# Altium PCB MB1066.PcbDoc
Units mm, origin at the board's own origin, x right, y up, seen from the top; angles counter-clockwise.
Board outline 16 x 38 mm, 2 copper layers (Top Layer, Bottom Layer), stack 1.571 mm thick; 21 components, 24 nets, 108 pads, 46 vias.
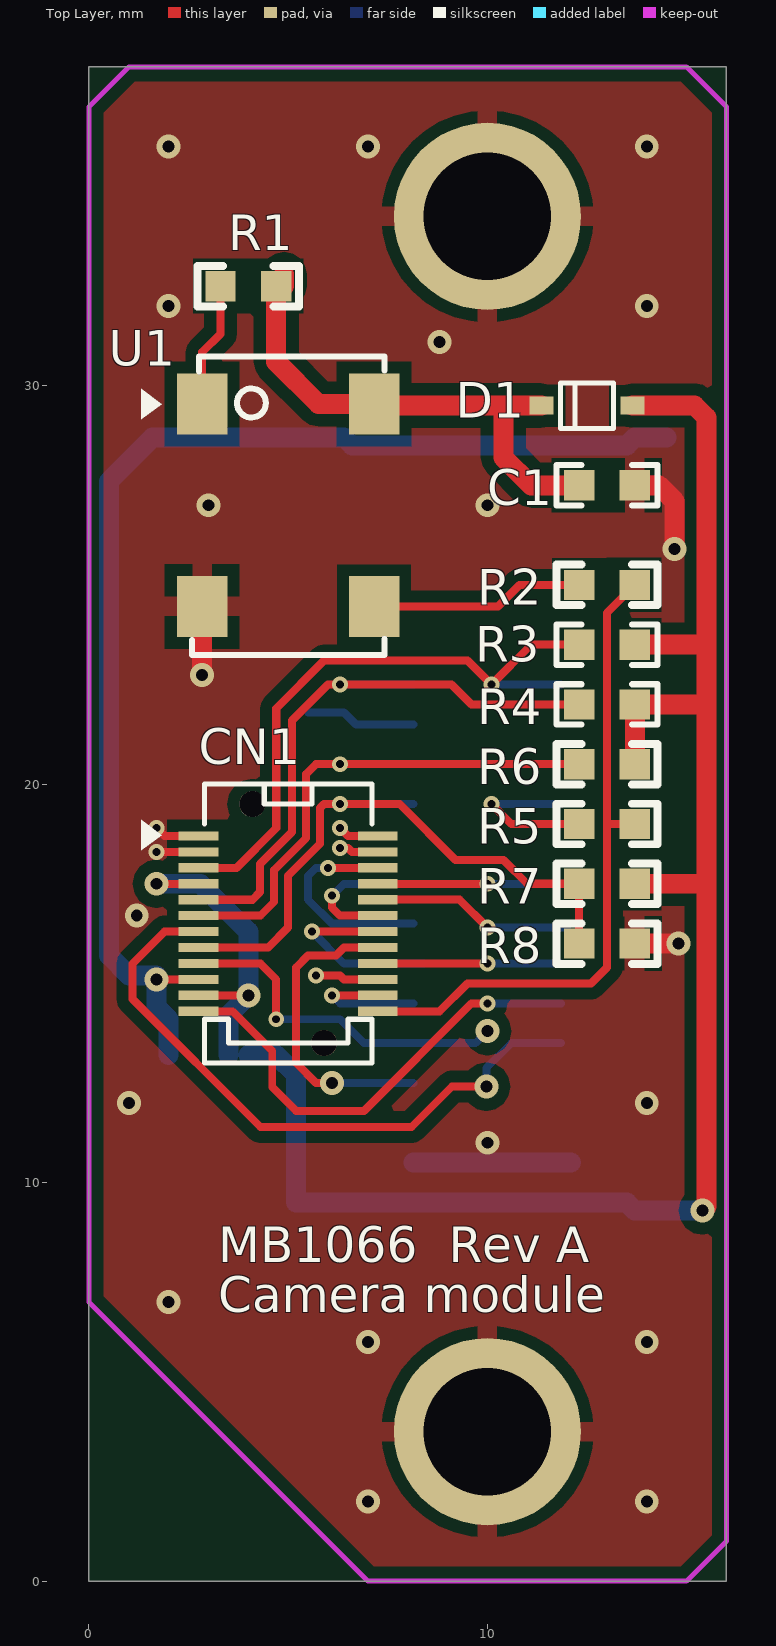
[diagram p0: Top Layer view]
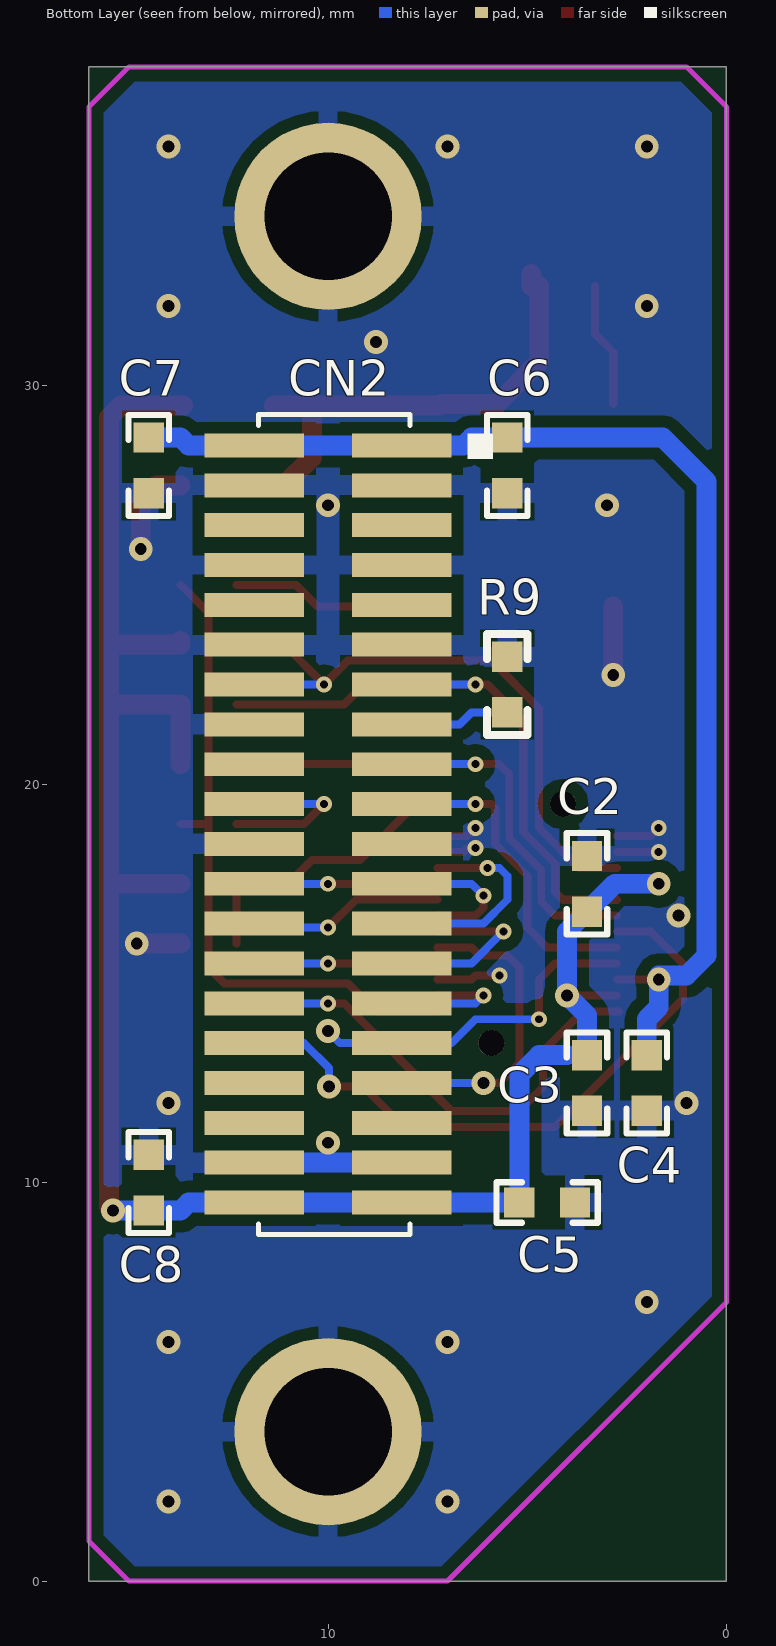
[diagram p1: Bottom Layer view, seen from below]

## Layer stack, top to bottom
Top Layer: signal copper 0.0356
Dielectric: core 1.5, FR-4, Dk 4.8
Bottom Layer: signal copper 0.0356

## Board outline
0,0 0,38 16,38 16,0 0,0

## Design rules (kind name [scope] priority, off if disabled: settings)
Clearance Clearance_1 [(InPoly)] p1: gap=0.3
Clearance [All] p2: gap=0.15
ComponentClearance [All] p1: gap=0.254 collisioncheckmode=3 verticalgap=0.254
HoleSize [All] p1: absolutevalues=TRUE maxlimit=3.81 minlimit=0.025 maxpercent=80.000 minpercent=20.000
PlaneClearance [All] p1: clearance=0.5
PolygonConnect PolygonConnect_2 [(InComponent('CN1'))] p1: connectstyle=NoConnect reliefconductorwidth=0.254 reliefentries=2 polygonreliefangle="90 Angle"
PolygonConnect PolygonConnect_1 [IsVia] p2: connectstyle=Direct reliefconductorwidth=0.508 reliefentries=4 polygonreliefangle="90 Angle"
PolygonConnect [All] p3: connectstyle=Relief reliefconductorwidth=0.5 reliefentries=4 polygonreliefangle="90 Angle"
RoutingLayers [All] p1: top layer_v5=FALSE bottom layer_v5=FALSE
RoutingVias [All] p1: holewidth=0.3 width=0.6 viastyle="Through Hole" minholewidth=0.2 minwidth=0.4 maxholewidth=0.7 maxwidth=1.3
SolderMaskExpansion [All] p1: expansion=0.102
TestPointUsage [All] p1: valid=0 allowmultiple=FALSE
Testpoint [(IsPad And (OnTopLayer Or OnBottomLayer))] p1: side=3 testpointundercomponent=TRUE minsize=1.016 maxsize=2.54 preferedsize=1.524 minholesize=0 maxholesize=1.016 preferedholesize=0.813 testpointgrid=0.025 style=297 order=0123456789
Width [All] p1: maxlimit=2.54 minlimit=0.15 preferedwidth=0.254 toplayer_maxwidth=2.5 toplayer_prefwidth=0.2 bottomlayer_maxwidth=2.5 bottomlayer_prefwidth=0.2 minimp=50.000000 maximp=50.000000 favimp=50.000000
15 further rules are at their usual default settings.

## Classes and differential pairs
net class PAR_D[0..7]: PAR_D0 PAR_D1 PAR_D2 PAR_D3 PAR_D4 PAR_D5 PAR_D6 PAR_D7

## Components (designator, comment, footprint, x,y, rotation, side; value= is the part's Value field where it differs from the comment)
C1 "100nF" 0603C 13,27.5 r180 top (schematic designator C8)
C2 "100nF" 0603C 3.5,17.5 r270 bottom (schematic designator C3)
C3 "100nF" 0603L 3.5,12.5 r90 bottom (schematic designator C5)
C4 "100nF" 0603C 2,12.5 r90 bottom
C5 "100nF" 0603C 4.5,9.5 r0 bottom (schematic designator C6)
C6 "100nF" 0603C 5.5,28 r270 bottom (schematic designator C1)
C7 "100nF" 0603C 14.5,28 r90 bottom (schematic designator C2)
C8 "100nF" 0603C 14.5,10 r270 bottom (schematic designator C7)
CN1 "24-5805-024-000-829+" 24-5805-024-000-829 5,16.5 r270 top (schematic designator CN2)
CN2 "FTMH-120-03-L-DV-ES" FTMH-120-03-L-DV-ES 10,19 r270 bottom locked (schematic designator CN1)
D1 "BAT60JFILM" SOD-323 12.5,29.5 r0 top
R1 "10K" 0603R 4,32.5 r0 top (schematic designator R7)
R2 "[N/A]" 0603R 13,25 r180 top (schematic designator R6)
R3 "[N/A]" 0603R 13,23.5 r0 top (schematic designator R8)
R4 "[N/A]" 0603R 13,22 r0 top (schematic designator R9)
R5 "0" 0603R 13,19 r180 top
R6 "10K" 0603R 13,20.5 r0 top (schematic designator R2)
R7 "22K" 0603R 13,17.5 r0 top (schematic designator R1)
R8 "1K" 0603R 13,16 r0 top (schematic designator R4)
R9 "0" 0603R 5.5,22.5 r270 bottom (schematic designator R3)
U1 "SM7745HEW-24.0M" XTAL_5X7 5,27 r270 top

## Footprints (in the part's own frame and the unit in brackets; to place one, negate y for a bottom-side part, rotate by r counter-clockwise, add the part's x,y. Pads: shape width x height; smd on the part's side, far side on the other; paste and mask are expansions set on the pad)
24-5805-024-000-829 [mm]
  round 0.65 hole 0.65: 0(-3,-0.9) 0(3,0.9)
  rect 0.23x1 smd: 1(-2.2,-2.25) 2(-1.8,-2.25) 3(-1.4,-2.25) 4(-1,-2.25) 5(-0.6,-2.25) 6(-0.2,-2.25) 7(0.2,-2.25) 8(0.6,-2.25) 9(1,-2.25) 10(1.4,-2.25) 11(1.8,-2.25) 12(2.2,-2.25) 13(2.2,2.25) 14(1.8,2.25) 15(1.4,2.25) 16(1,2.25) 17(0.6,2.25) 18(0.2,2.25) 19(-0.2,2.25) 20(-0.6,2.25) 21(-1,2.25) 22(-1.4,2.25) 23(-1.8,2.25) 24(-2.2,2.25)
  silkscreen extent -3.5,-3.68 3.5,2.1
0603C [mil]
  rect 30x30 smd: 1(27.5,0) 2(-27.5,0)
  silkscreen extent -50,-20 50,20
0603L [mil]
  rect 30x30 smd: 1(27.5,0) 2(-27.5,0)
  silkscreen extent -50,-20 50,20
0603R [mil]
  rect 30x30 smd: 1(27.5,0) 2(-27.5,0)
  silkscreen extent -50,-20 50,20
FTMH-120-03-L-DV-ES [mm]
  rect 0.6x2.5 smd: 1(-9.5,1.85) 2(-9.5,-1.85) 3(-8.5,1.85) 4(-8.5,-1.85) 5(-7.5,1.85) 6(-7.5,-1.85) 7(-6.5,1.85) 8(-6.5,-1.85) 9(-5.5,1.85) 10(-5.5,-1.85) 11(-4.5,1.85) 12(-4.5,-1.85) 13(-3.5,1.85) 14(-3.5,-1.85) 15(-2.5,1.85) 16(-2.5,-1.85) 17(-1.5,1.85) 18(-1.5,-1.85) 19(-0.5,1.85) 20(-0.5,-1.85) 21(0.5,1.85) 22(0.5,-1.85) 23(1.5,1.85) 24(1.5,-1.85) 25(2.5,1.85) 26(2.5,-1.85) 27(3.5,1.85) 28(3.5,-1.85) 29(4.5,1.85) 30(4.5,-1.85) 31(5.5,1.85) 32(5.5,-1.85) 33(6.5,1.85) 34(6.5,-1.85) 35(7.5,1.85) 36(7.5,-1.85) 37(8.5,1.85) 38(8.5,-1.85) 39(9.5,1.85) 40(9.5,-1.85)
  silkscreen extent -10.28,-1.75 10.3,4.14
SOD-323 [mm]
  rect 0.6x0.45 smd: 1(1.143,0) 2(-1.143,0)
  silkscreen extent -0.67,-0.57 0.67,0.57
XTAL_5X7 [mil]
  rect 60x50 smd: 1(-100,-85) 2(100,-85) 3(100,85) 4(-100,85)
  silkscreen extent -147,-145 148,95

## Part data
C1 C2 C3 C4 C5 C6 C7 C8: library part Cap, "Capacitor"
CN2: library part "Header 20X2", "20*2Pins, 1mm_SMT, male"
D1: library part Diode, "Default Diode"
R1 R2 R4 R5 R6 R7 R8 R9: library part Res1, "Resistor"
R3: library part Res1, "Resistor 10K"
U1: library part SM7745HEV-50.0M

## Free pads (board coordinates)
  round 4.7 hole 3.2: 0(10,3.75) 0(10,34.25)

## Via types
v1: diameter 0.6, hole 0.3, Top Layer to Bottom Layer, tented both sides, 24 vias
v2: diameter 0.4, hole 0.2, Top Layer to Bottom Layer, tented both sides, 19 vias
v3: diameter 0.6, hole 0.3, Top Layer to Bottom Layer, 3 vias

## Nets (pads, with @x,y where several pads share a name; then routed paths per layer and width w, separated by ;. In a path a pad name is that pad's centre, name@x,y a point inside that pad or via, vN(x,y) a via of type N, cw(c..) or ccw(c..) an arc to the next point about the centre after c; other vN are vias at no path point)
+1V8: C4.1 C6.2 C7.1 CN1.10 CN2.1 CN2.2 | length 31.1
  Top Layer w0.2: v1(1.7,15.1) CN1.10
  Bottom Layer w0.5: C4.1 2,14.1 1.7,14.4 1.7,15.2 1,15.2 0.5,15.7 0.5,27.6 1.599,28.698 6.402,28.698 6.6,28.5 13.5,28.5 13.698,28.698 C7.1
+2V8: C2.1 C3.1 C5.1 C8.1 CN1.4 CN1.11 CN2.39 CN2.40 D1.1 R3.1 R4.1 R6.1 R7.1 | length 52.2
  Top Layer w0.2: v1(1.7,17.5) CN1.4 ; CN1.11 v1(4,14.7)
  Top Layer w0.5: D1.1 15.2,29.5 15.5,29.2 15.5,9.4 v1(15.4,9.3) ; R7.1 15.5,17.5 ; R3.1 15.5,23.5 ; R6.1 R4.1 15.5,22 ; R3.1 R3.1@13.7,23.6
  Bottom Layer w0.5: v1(1.7,17.5) 2.802,17.5 4,16.302 v1(4,14.7) 3.5,14.2 C3.1 ; 4,13.199 4.7,13.199 5.199,12.7 C5.1 13.5,9.5 13.698,9.302 C8.1 14.502,9.3 v1(15.4,9.3)
CAMERA_CLK: CN1.13 R2.2 R5.2 | length 16.8
  Top Layer w0.2: CN1.13 8.8,14.3 9.5,15 12.6,15 13,15.4 13,24.3 13.698,24.998 R2.2 ; 13,19 R5.2 R5.2
CAMERA_RST: CN1.6 CN2.17 R6.2 | length 14.6
  Top Layer w0.2: CN1.6 4.3,16.7 4.648,17.048 4.648,17.848 5.452,18.652 5.452,20.252 5.7,20.5 R6.2
  Bottom Layer w0.2: v2(6.3,20.5) CN2.17@8.4,20.5
EXTCLK: CN2.20 R5.1 | length 4.2
  Top Layer w0.203: v2(10.1,19.5) 10.6,19 R5.1
  Bottom Layer w0.203: v2(10.1,19.5) CN2.20
GND: C1.2 C2.2 C3.2 C4.2 C5.2 C6.1 C7.2 C8.2 CN1.1 CN1.2 CN1.15 CN1.23 CN1.24 CN2.3 CN2.4 CN2.7 CN2.8 CN2.11 CN2.12 CN2.16 CN2.21 CN2.22 CN2.37 CN2.38 pad.0 R8.1 R9.2 U1.2 | length 14.9
  Top Layer w0.2: v2(1.7,18.3) CN1.2 ; v2(1.7,18.9) 1.9,18.7 CN1.1 ; v2(5.7,15.2) 6.3,15.2 6.4,15.1 CN1.15 ; v2(6.3,18.4) 6.5,18.4 6.6,18.3 CN1.23 ; v2(6.3,18.9) 6.5,18.7 CN1.24
  Top Layer w0.5: v1(2.841,22.741) U1.2 ; R8.1 v1(14.8,16) ; C1.2 14.3,27.5 14.7,27.1 v1(14.7,25.9)
  Bottom Layer w0.5: CN2.37 CN2.38@12.1,10.5
  other v1: 7,2 14,2 7,6 14,6 2,7 10,11 1,12 14,12 1.2,16.708 3,27 10,27 8.8,31.1 2,32 14,32 2,36 7,36 14,36
NetC1_1: C1.1 D1.2 R1.1 U1.4 | length 12.8
  Top Layer w0.5: R1.1 4.698,30.602 5.76,29.54 U1.4 7.199,29.5 D1.2 ; R1.1@4.9,32.5 R1.1@4.9,32.798 ; 10.4,29.5 10.4,28.2 11.1,27.5 C1.1
NetCN2_15: CN2.15 R9.1 | length 2.8
  Bottom Layer w0.203: R9.1 6.398,21.802 6.7,21.5 CN2.15
NetR1_2: R1.2 U1.1 | length 3.2
  Top Layer w0.203: U1.1 2.841,30.841 3.301,31.301 R1.2
NetR2_1: R2.1 U1.3 | length 5.4
  Top Layer w0.203: U1.3 10.262,24.46 10.802,25 R2.1
PAR_D0: CN1.19 CN2.23 | length 2.5
  Top Layer w0.2: v2(6.1,17.2) 6.1,16.9 6.3,16.7 CN1.19
  Bottom Layer w0.2: v2(6.1,17.2) 6.4,17.5 6.9,17.5
PAR_D1: CN1.21 CN2.24 | length 4.6
  Top Layer w0.2: CN1.21 v2(10,17.5)
  Bottom Layer w0.2: v2(10,17.5) CN2.24
PAR_D2: CN1.22 CN2.25 | length 5.3
  Top Layer w0.2: v2(6,17.9) CN1.22
  Bottom Layer w0.2: v2(6,17.9) 5.7,17.9 5.5,17.7 5.5,17.1 6.1,16.5 CN2.25
PAR_D3: CN1.20 CN2.26 | length 5
  Top Layer w0.2: CN1.20 9.3,17.1 v2(10,16.4)
  Bottom Layer w0.2: v2(10,16.4) CN2.26@12,16.4
PAR_D4: CN1.18 CN2.27 | length 4.8
  Top Layer w0.2: v2(5.6,16.3) CN1.18
  Bottom Layer w0.2: v2@5.601,16.299 v2(5.6,16.3) 6.397,15.5 CN2.27@8.4,15.5
PAR_D5: CN1.16 CN2.28 | length 4.6
  Top Layer w0.2: CN1.16 v2(10,15.5)
  Bottom Layer w0.2: v2(10,15.5) CN2.28
PAR_D6: CN1.14 CN2.29 | length 3.3
  Top Layer w0.2: v2(6.1,14.7) CN1.14
  Bottom Layer w0.2: v2(6.1,14.7) 6.3,14.5 CN2.29
PAR_D7: CN1.12 CN2.30 | length 11.8
  Top Layer w0.2: CN1.12@2.7,14.3 3.6,14.3 4.6,13.3 4.6,12.4 5.2,11.8 6.9,11.8 9.6,14.5 v2(10,14.5)
  Bottom Layer w0.2: v2(10,14.5) CN2.30
PAR_HSYNC: CN1.9 CN2.31 | length 8.8
  Top Layer w0.2: CN1.9 4.3,15.5 4.7,15.1 v2(4.7,14.1)
  Bottom Layer w0.2: v2(4.7,14.1) 6.3,14.1 6.9,13.5 9.7,13.5 v3(10,13.8)
PAR_PCLK: CN1.17 CN2.33 | length 7.8
  Top Layer w0.2: v3(6.1,12.5) 5.7,12.5 5.2,13 5.2,15.4 5.5,15.7 6.2,15.7 6.4,15.9 CN1.17
  Bottom Layer w0.2: v3(6.1,12.5) CN2.33
PAR_VSYNC: CN1.7 CN2.32 | length 16.1
  Top Layer w0.2: CN1.7 1.9,16.3 1.092,15.492 1.092,14.608 4.3,11.4 8.1,11.4 9.108,12.408 v3(9.973,12.408)
  Bottom Layer w0.2: v3(9.973,12.408) 9.973,12.873 10.6,13.5 CN2.32
SCL: CN1.5 CN2.13 R4.2 | length 15.9
  Top Layer w0.203: CN1.5 4.1,17.1 4.297,17.297 4.297,17.997 5.1,18.8 5.1,21.6 6,22.5 9.1,22.5 9.6,22 R4.2
  Bottom Layer w0.203: v2(6.3,22.5) CN2.13
SDA: CN1.3 CN2.14 R3.2 | length 15.9
  Top Layer w0.203: CN1.3 3.7,17.9 4.7,18.9 4.7,21.9 5.9,23.1 9.5,23.1 v2(10.1,22.5) 11.1,23.5 R3.2
  Bottom Layer w0.203: v2(10.1,22.5) CN2.14
STANDBY: CN1.8 CN2.19 R7.2 R8.2 | length 16.5
  Top Layer w0.203: CN1.8 4.5,15.9 5,16.4 5,17.7 5.803,18.503 5.803,19.403 5.9,19.5 7.8,19.5 9.2,18.1 10.4,18.1 11,17.5 R7.2 R8.2
  Bottom Layer w0.203: v2(6.3,19.5) CN2.19
pads on no net: CN1.0 CN2.5 CN2.6 CN2.9 CN2.10 CN2.18 CN2.34 CN2.35 CN2.36

## Polygon pours and split planes (outlines as drawn)
GND on Top Layer "Bottom Layer-GN" (solid, remove dead copper, pour order 1000): 0,0 0,38 16,38 16,0 0,0
GND on Bottom Layer "Bottom Layer-GN" (solid, remove dead copper, pour order 1001): 0,0 0,38 16,38 16,0 0,0

## Keep-outs
Keep-Out Layer:
  lines w0.127: 0,7 7,0 15,0 16,1 16,37 15,38 1,38 0,37 0,36 0,7

## Silkscreen, mask and mechanical layers (free items; w line width, h text height)
Top Overlay:
  text "MB1066  Rev A" at 3.25,8 h0.89
  text "Camera module" at 3.25,6.75 h0.89
Mechanical 1:
  lines w0.127: 0,9 0,7 ; 0,7 0,37 1,38 15,38 16,37 16,1 15,0 7,0 0,7
  text "MB1066" at 4,44 h1.52
Drill Drawing:
  lines w0.05: 20.524,15.692 55.476,15.692 ; 20.524,16.562 55.476,16.562 ; 19,11.3 ccw(c19.3,11.3) 19.3,11 56.7,11 ccw(c56.7,11.3) 57,11.3 57,17.7 ccw(c56.7,17.7) 56.7,18 19.3,18 ccw(c19.3,17.7) 19,17.7 19,11.3
  text ".legend" at 18,35.5 h0.89
  text "Layer Stack Up Detail for: MB1066.PcbDoc" at 20.524,16.866 h0.55
  text "Layer" at 20.524,16.237 h0.2
  text "Gerber" at 27.648,16.237 h0.2
  text "Copper" at 31.766,16.237 h0.2
  text "Dielectric" at 36.21,16.237 h0.2
  text "Dielectric" at 40.795,16.237 h0.2
  text "Dielectric" at 46.419,16.237 h0.2
  text "Dielectric" at 51.003,16.237 h0.2
  text "Name" at 20.524,15.837 h0.2
  text "Document" at 27.648,15.837 h0.2
  text "Thickness" at 31.766,15.837 h0.2
  text "Height" at 36.21,15.837 h0.2
  text "Material" at 40.795,15.837 h0.2
  text "Constant" at 46.419,15.837 h0.2
  text "Type" at 51.003,15.837 h0.2
  text "Top Solder Mask" at 20.524,15.01 h0.3
  text "(.GTS)" at 27.648,15.01 h0.3
  text "0.0102mm" at 36.21,15.01 h0.3
  text "Solder Resist" at 40.795,15.01 h0.3
  text "3.50" at 46.419,15.01 h0.3
  text "Top Layer" at 20.524,14.135 h0.3
  text "(.GTL)" at 27.648,14.135 h0.3
  text "0.0356mm" at 31.766,14.135 h0.3
  text "1.5mm" at 36.21,13.698 h0.3
  text "FR-4" at 40.795,13.698 h0.3
  text "4.80" at 46.419,13.698 h0.3
  text "Core" at 51.003,13.698 h0.3
  text "Bottom Layer" at 20.524,13.26 h0.3
  text "(.GBL)" at 27.648,13.26 h0.3
  text "0.0356mm" at 31.766,13.26 h0.3
  text "Bottom Solder Mask" at 20.524,12.385 h0.3
  text "(.GBS)" at 27.648,12.385 h0.3
  text "0.0102mm" at 36.21,12.385 h0.3
  text "Solder Resist" at 40.795,12.385 h0.3
  text "3.50" at 46.419,12.385 h0.3

## Dimensions
0,36 to 16,37 on Mechanical 1
7,0 to 1,38 on Mechanical 1